# Altium PCB sdboard.PcbDoc
Units mm, origin at the board's own origin, x right, y up, seen from the top; angles counter-clockwise.
Board outline 29.59 x 20.19 mm, 2 copper layers (Top Layer, Bottom Layer); 3 components, 7 nets, 30 pads, 3 vias.
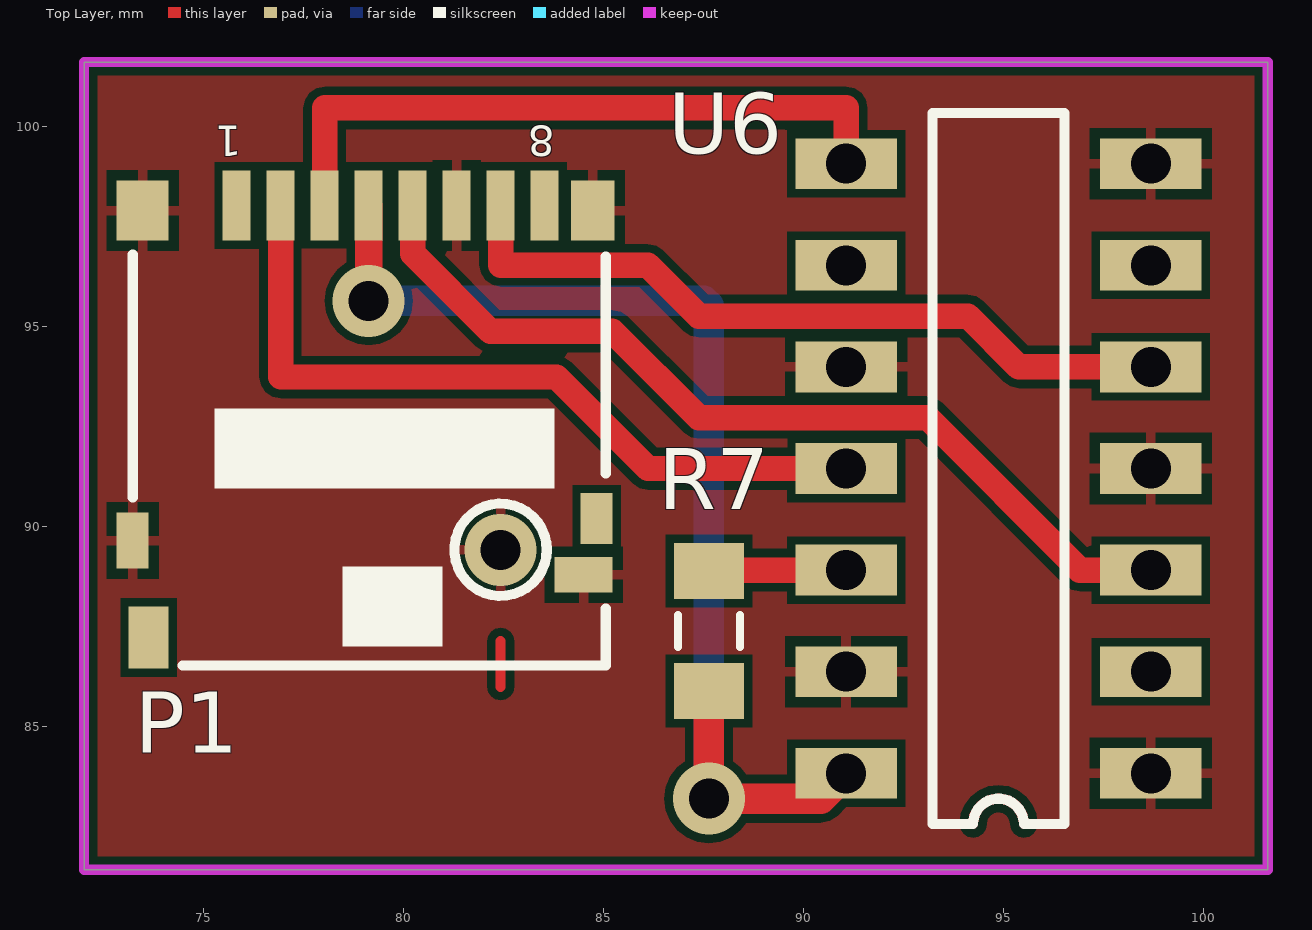
[diagram p0: Top Layer view]
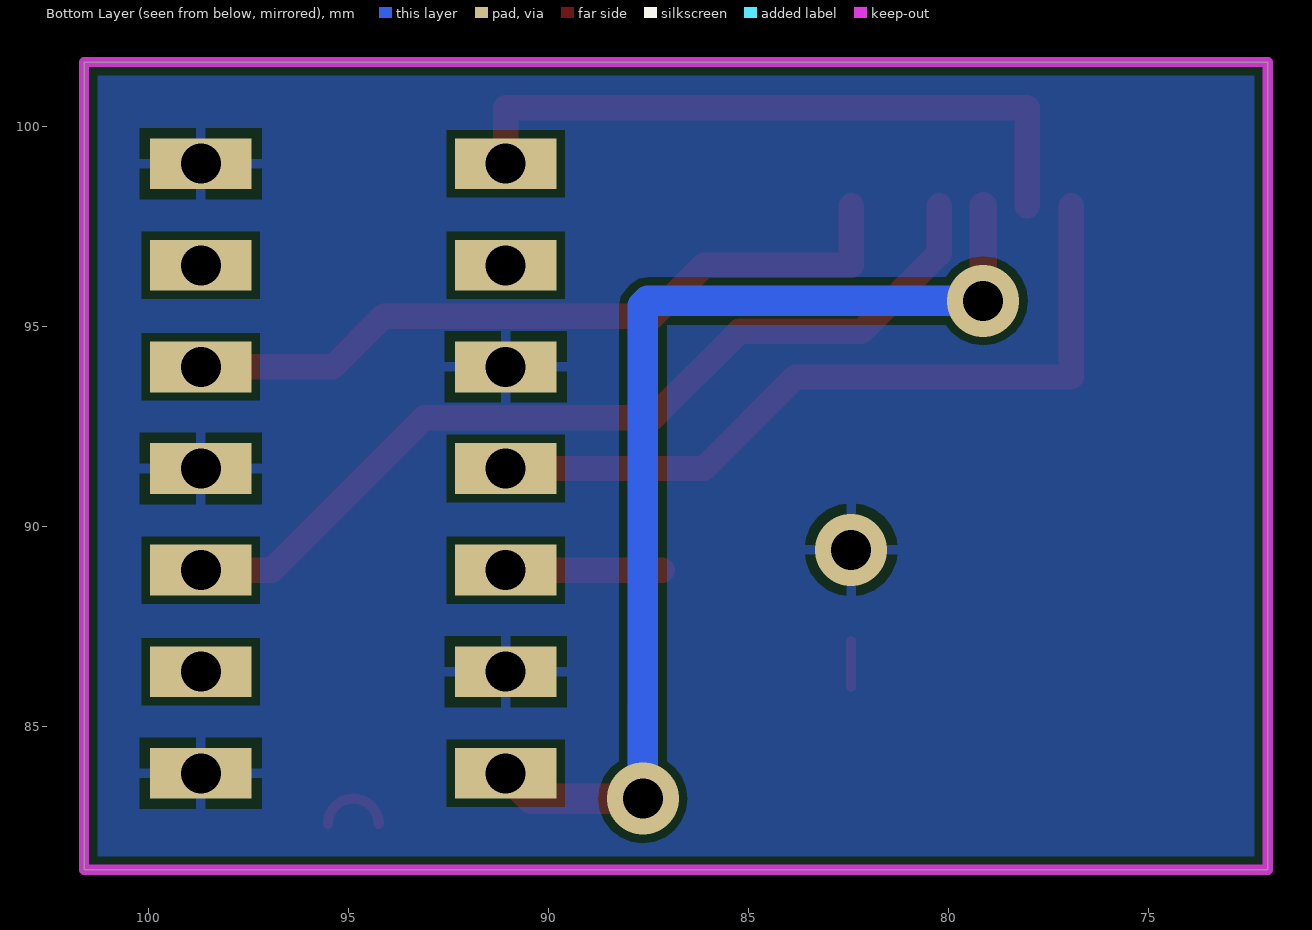
[diagram p1: Bottom Layer view, seen from below]

## Layer stack, top to bottom
Top Solder: solder mask 0.0102, Solder Resist, Dk 3.5
Top Layer: signal copper 0.0356
Dielectric 1: dielectric 0.32, FR-4, Dk 4.8
Bottom Layer: signal copper 0.0356
Bottom Solder: solder mask 0.0102, Solder Resist, Dk 3.5

## Board outline
72.009,81.407 101.6,81.407 101.6,101.6 72.009,101.6

## Design rules (kind name [scope] priority, off if disabled: settings)
Clearance [All] p1: gap=0.203
PolygonConnect [All] p1: connectstyle=Relief reliefconductorwidth=0.254 reliefentries=4 polygonreliefangle="90 Angle" airgapwidth=0.254
RoutingVias [All] p1: holewidth=0.635 width=1.016 viastyle="Through Hole" minholewidth=0.711 minwidth=1.27 maxholewidth=0.711 maxwidth=1.27
SolderMaskExpansion [All] p1: expansion=0.102
UnpouredPolygon [All] p1: allowunpoured=FALSE
Width [All] p1: maxlimit=1.27 minlimit=0.203 preferedwidth=0.203
29 further rules are at their usual default settings.

## Components (designator, comment, footprint, x,y, rotation, side; value= is the part's Value field where it differs from the comment)
P1 "114-00841-68 Amphenol" "Final Board uSD" 79.375,96.012 r180 top
R7 "1206 Res" RESC3115X06M 87.63,87.376 r90 top
U6 "SN74AHC125" DIP14 98.679,83.82 r180 top

## Footprints (in the part's own frame and the unit in brackets; to place one, negate y for a bottom-side part, rotate by r counter-clockwise, add the part's x,y. Pads: shape width x height; smd on the part's side, far side on the other; paste and mask are expansions set on the pad)
DIP14 [mm]
  rect 2.54x1.27 hole 1: 1(0,0) 2(0,-2.54) 3(0,-5.08) 4(0,-7.62) 5(0,-10.16) 6(0,-12.7) 7(0,-15.24) 8(7.62,-15.24) 9(7.62,-12.7) 10(7.62,-10.16) 11(7.62,-7.62) 12(7.62,-5.08) 13(7.62,-2.54) 14(7.62,0)
  silkscreen extent 2.16,-16.51 5.46,1.27
"Final Board uSD" [mm]
  rect 0.7x1.75 smd: 1(3.55,-2) 2(2.45,-2) 3(1.35,-2) 4(0.25,-2) 5(-0.85,-2) 6(-1.95,-2) 7(-3.05,-2) 8(-4.15,-2)
  rect 1.097x1.5 smd: 9(-5.35,-1.875)
  rect 1.3x1.5 smd: 10(5.9,-1.875)
  rect 0.8x1.4 smd: 11(6.15,6.375)
  rect 1x1.55 smd: 12(5.75,8.8)
  rect 0.8x1.27 smd: 13(-5.45,5.825)
  rect 1.45x0.889 smd: 14(-5.125,7.225)
  silkscreen extent -5.68,-0.77 6.15,9.5
RESC3115X06M [mm] "Chip Resistor, 2-Leads, Body 3.13x1.55mm, IPC Low Density"
  rect 1.4x1.75 smd: 1(-1.5,0) 2(1.5,0)
  silkscreen extent -0.4,-0.77 0.4,0.77, body extent -1.63,-0.82 1.63,0.82, height 0.6

## Part data
P1: library part "uSD - 101-00660", "MicroSD Card Slot"
R7: library part "1206 Resistor"
U6: "Quad Input Buffer"

## Via types
v1: diameter 1.8, hole 1, Top Layer to Bottom Layer, 3 vias

## Nets (pads, with @x,y where several pads share a name; then routed paths per layer and width w, separated by ;. In a path a pad name is that pad's centre, name@x,y a point inside that pad or via, vN(x,y) a via of type N, cw(c..) or ccw(c..) an arc to the next point about the centre after c; other vN are vias at no path point)
GND: P1.6 P1.9 P1.10 P1.11 P1.14 U6.1 U6.4 U6.7 U6.10 U6.13
  other v1: 82.423,89.408
NetP1_2: P1.2 U6.11 | length 19
  Top Layer w0.635: P1.2 76.925,93.726 83.82,93.726 86.106,91.44 U6.11@90.678,91.44
NetP1_3: P1.3 U6.8 | length 16.9
  Top Layer w0.635: P1.3 78.025,100.457 91.059,100.457 U6.8
NetP1_5: P1.5 U6.3 | length 22.9
  Top Layer w0.635: P1.5 80.225,96.813 82.169,94.869 85.217,94.869 87.376,92.71 93.091,92.71 96.901,88.9 U6.3
NetP1_7: P1.7 U6.5 | length 18.8
  Top Layer w0.635: P1.7 82.425,96.52 86.106,96.52 87.376,95.25 94.107,95.25 95.377,93.98 U6.5
NetR7_2: R7.2 U6.12 | length 3.4
  Top Layer w0.635: R7.2@87.146,88.9 U6.12@90.551,88.9
V33: P1.4 R7.1 U6.14 | length 29.3
  Top Layer w0.686: v1(79.121,95.631) 79.125,95.635 P1.4
  Top Layer w0.762: R7.1@87.63,85.495 v1(87.63,83.185) 90.424,83.185 U6.14
  Bottom Layer w0.762: v1(79.121,95.631) 87.503,95.631 87.63,95.504 v1(87.63,83.185)
pads on no net: P1.1 P1.8 P1.12 P1.13 U6.2 U6.6 U6.9
copper on no net: | length 3.1
  Top Layer w0.254: 82.423,85.979 82.423,87.122 ; 94.234,82.55 cw(c94.869,82.55) 94.869,83.185 cw(c94.869,82.55) 95.504,82.55

## Polygon pours and split planes (outlines as drawn)
GND on Top Layer "Component Side-No Net" (solid, pour order 2): 72.009,101.6 101.6,101.6 101.6,81.407 72.009,81.407
GND on Bottom Layer "Component Side-No Net" (solid, pour order 4): 72.009,101.6 101.6,101.6 101.6,81.407 72.009,81.407

## Keep-outs
Keep-Out Layer:
  the board outline again, w0.254

## Silkscreen, mask and mechanical layers (free items; w line width, h text height)
Top Overlay:
  circle w0.254: c82.423,89.408 r1.154
Drill Drawing:
  text ".LEGEND" at 106.68,81.28 h1.52
  text "Drill Drawing." at 106.68,78.74 h1.52

## Dimensions
72.009,81.407 to 72.009,101.6 on Mechanical 1
72.009,81.407 to 101.6,81.407 on Mechanical 1

## Text inside footprints (layer, text, board x,y; h text height)
P1: Top Overlay "8" at 83.779,100.012 h0.76 r180; Top Overlay "1" at 75.952,100.012 h0.76 r180